# Altium PCB STM32_Smart.PcbDoc
Units mil, origin at the board's own origin, x right, y up, seen from the top; angles counter-clockwise.
Board outline 3440 x 2880 mil, 2 copper layers (Top Layer, Bottom Layer); 10 components, 49 nets, 149 pads, 0 vias.
Unrouted connection lines stored in the file: 91.
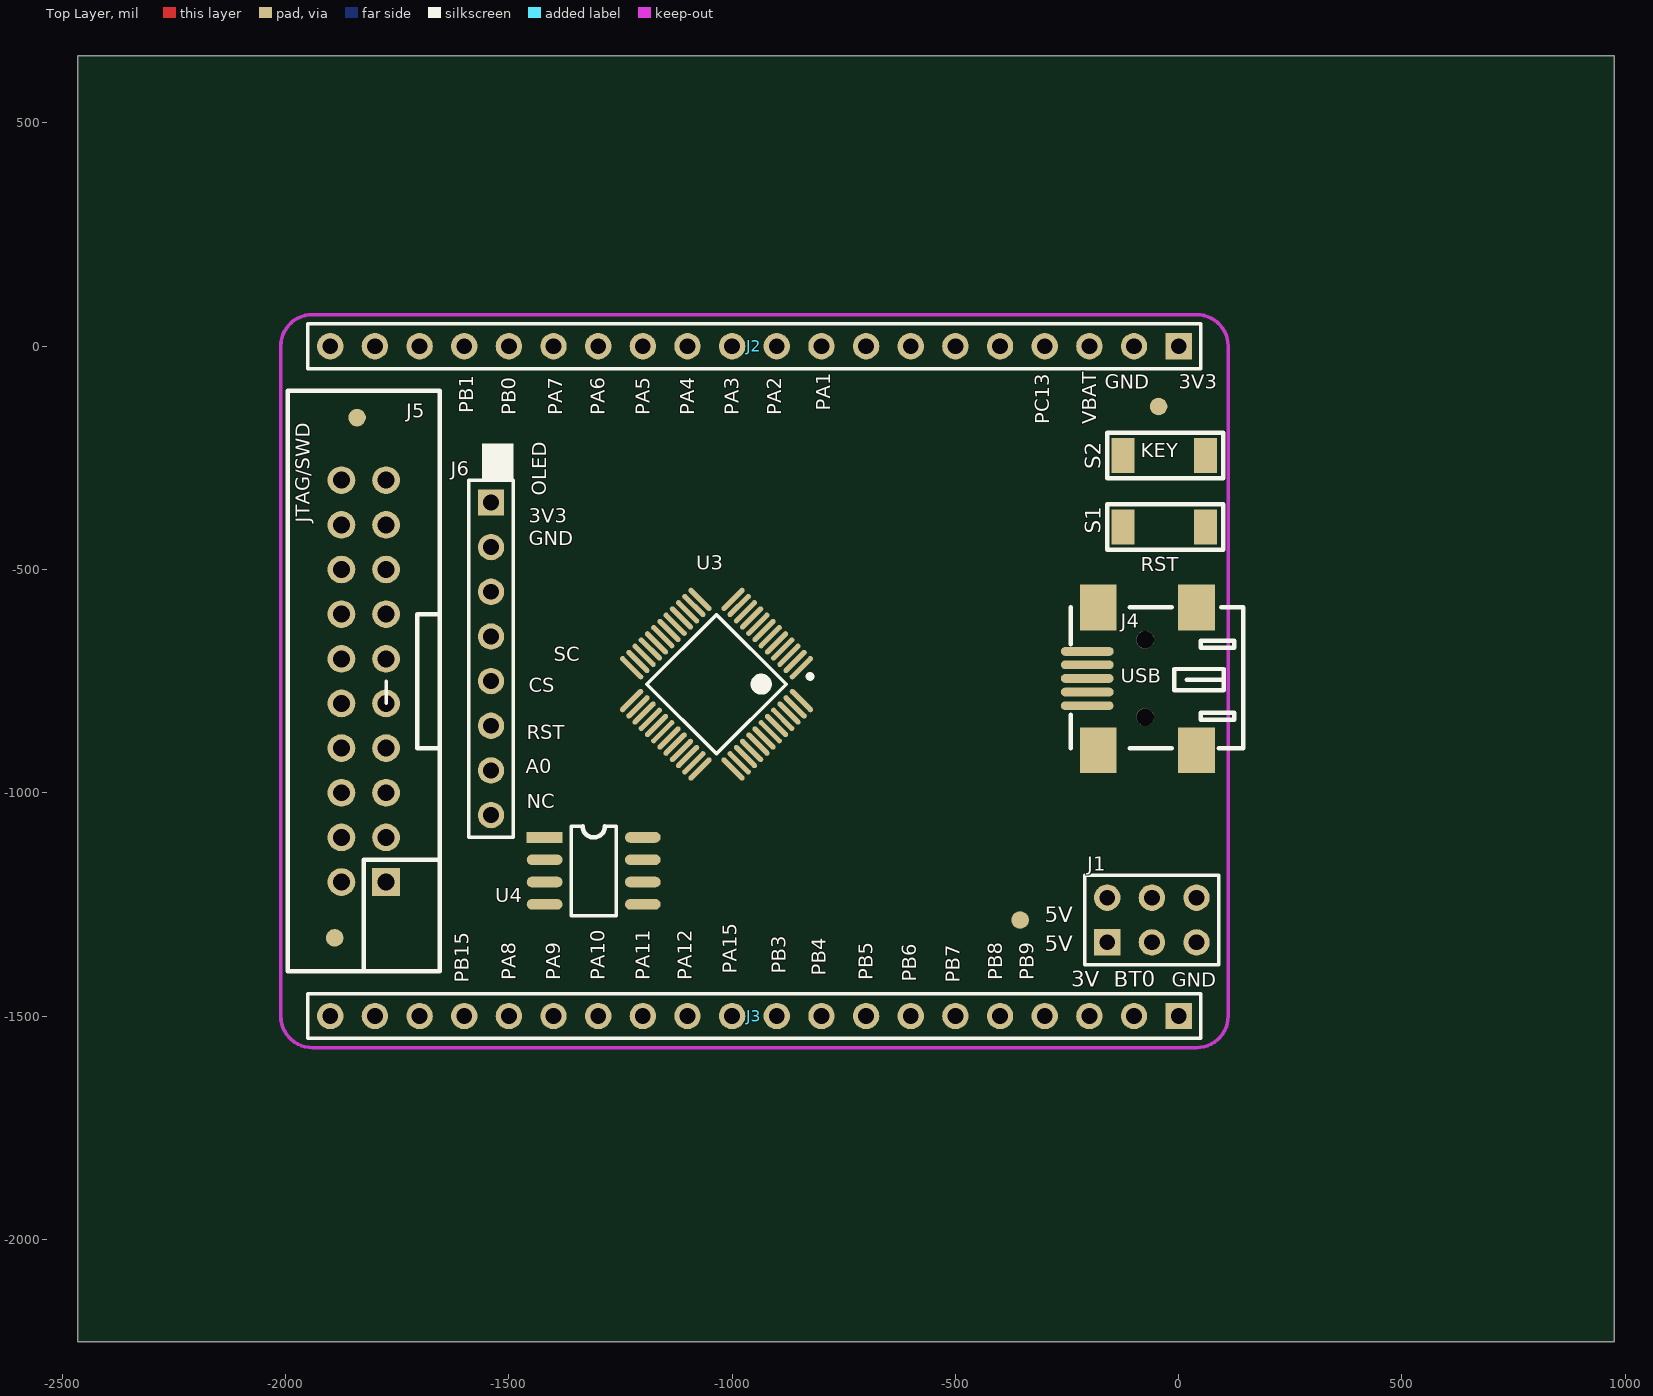
[diagram p0: Top Layer view]
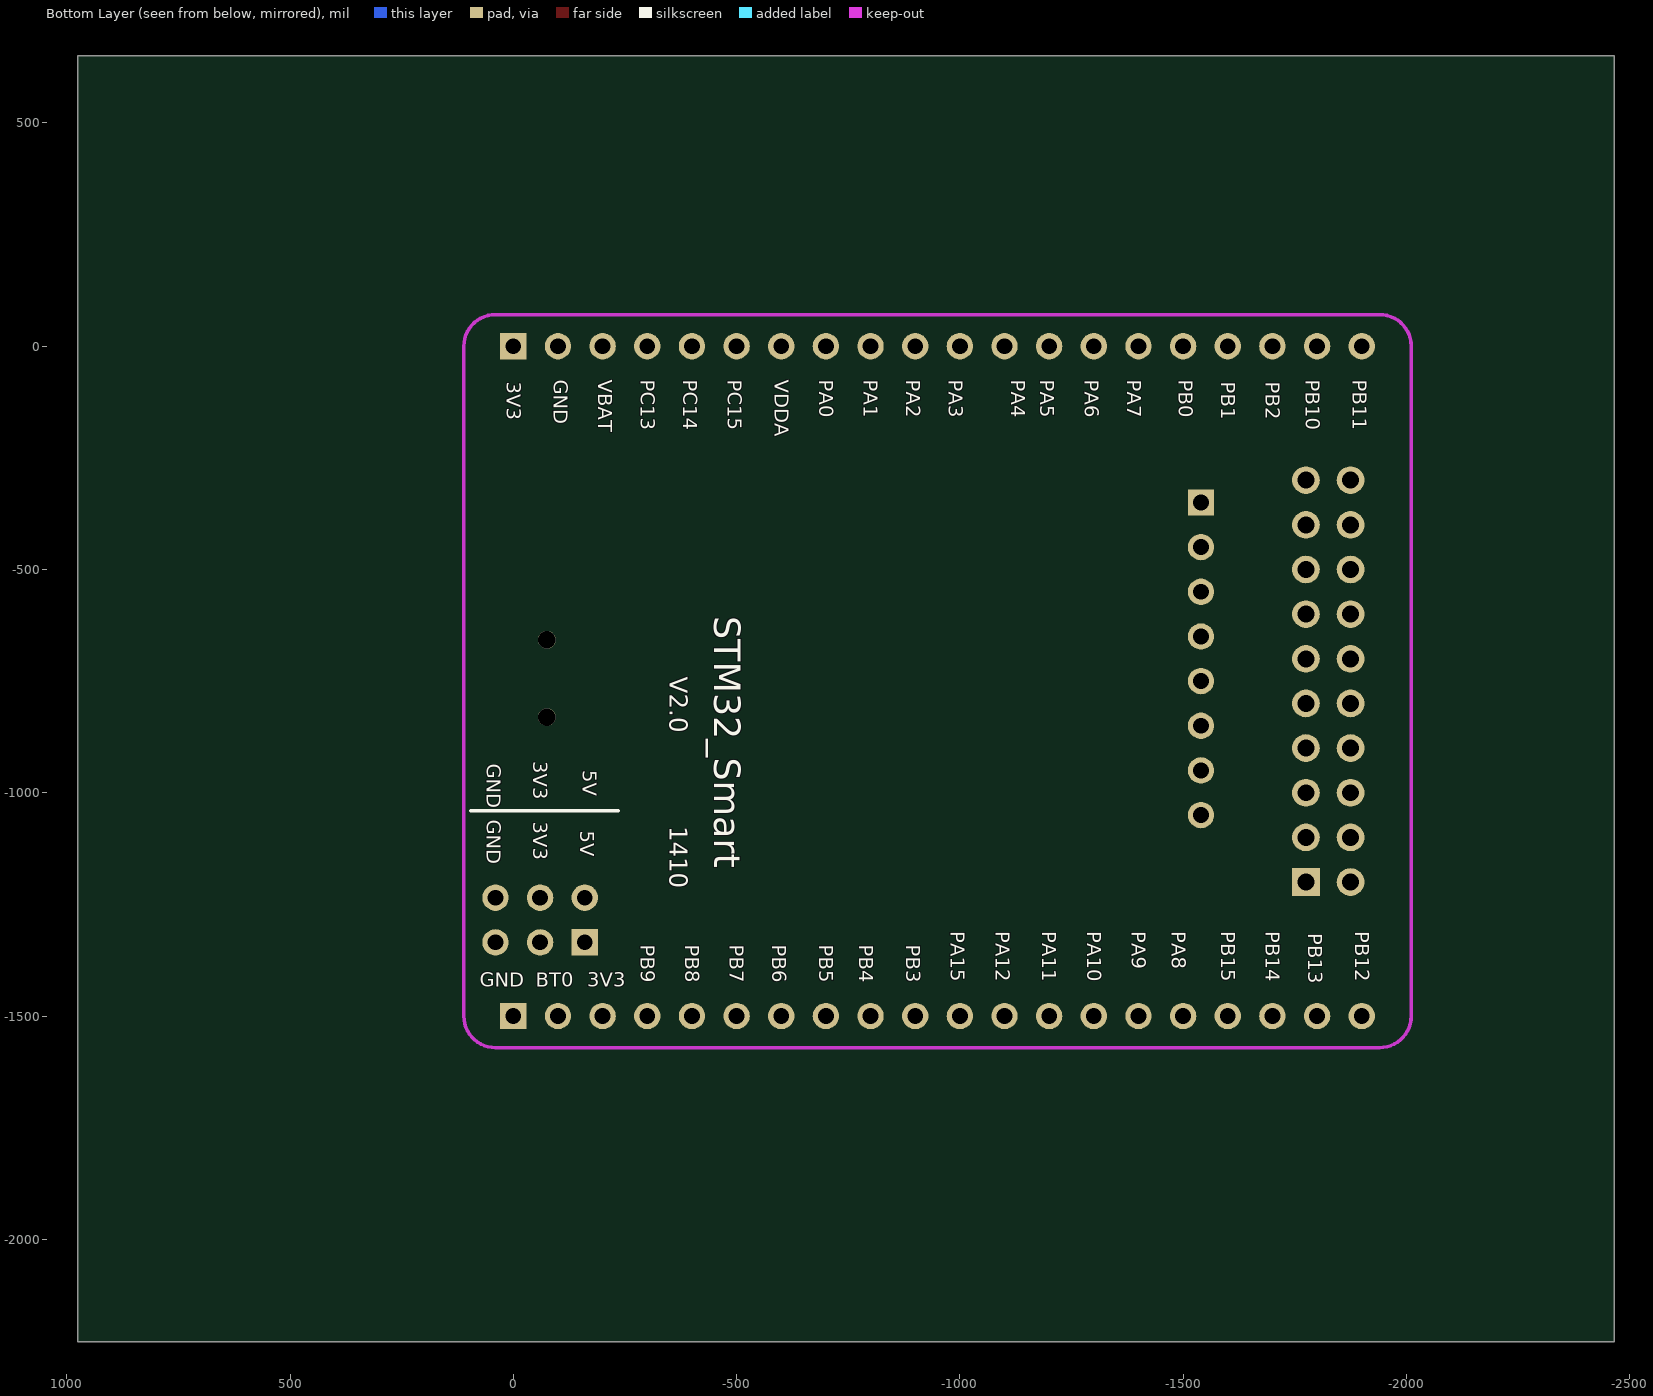
[diagram p1: Bottom Layer view, seen from below]

## Layer stack, top to bottom
Top Solder: solder mask 0.4, Solder Resist, Dk 3.5
Top Layer: signal copper 1.4
Dielectric1: dielectric 12.6, FR-4, Dk 4.8
Bottom Layer: signal copper 1.4
Bottom Solder: solder mask 0.4, Solder Resist, Dk 3.5

## Board outline
-2465,-2230 -2465,650 975,650 975,-2230

## Design rules (kind name [scope] priority, off if disabled: settings)
AssemblyTestPointUsage AssemblyTestPointUsage_1 [All] p2:
AssemblyTestpoint AssemblyTestpoint_1 [All] p2: testpointundercomponent=TRUE minsize=40 maxsize=100 preferedsize=60 minholesize=0 maxholesize=40 preferedholesize=32 testpointgrid=1 usegrid=TRUE gridtolerance=0.01 allowsidetop=TRUE allowsidebottom=TRUE
Clearance [All] p1: gap=16
ComponentClearance [All] p1: gap=1 collisioncheckmode=3 verticalgap=1 showdistances=FALSE
ComponentClearance ComponentClearance_1 [All] p2: gap=1 collisioncheckmode=3 verticalgap=1 showdistances=FALSE
DiffPairsRouting DiffPairsRouting_1 [All] p2: maxlimit=10 minlimit=10 mostfreqgap=10 toplayer_minwidth=15 toplayer_maxwidth=15 toplayer_prefwidth=15 bottomlayer_minwidth=15 bottomlayer_maxwidth=15 bottomlayer_prefwidth=15 maxuncoupledlength=500
FabricationTestPointUsage TestPointUsage [All] p2: valid=0 allowmultiple=FALSE
FabricationTestpoint Testpoint [All] p2: side=3 testpointundercomponent=TRUE minsize=40 maxsize=100 preferedsize=60 minholesize=0 maxholesize=40 preferedholesize=32 testpointgrid=1 allowsidetop=TRUE allowsidebottom=TRUE usegrid=TRUE gridtolerance=0.01
FanoutControl Fanout_LCC [IsLCC] p1: bgadir=Out bgaviamode=Centered fanoutstyle=Auto fanoutdirection=Alternating viagrid=1 // Fanout_LCC (Default Rule)
FanoutControl Fanout_BGA [IsBGA] p2: bgadir=Out bgaviamode=Centered fanoutstyle=Auto fanoutdirection=Alternating viagrid=1 // Fanout_BGA (Default Rule)
FanoutControl Fanout_Small [(CompPinCount < 5)] p3: bgadir=Out bgaviamode=Centered fanoutstyle=Auto fanoutdirection=OutThenIn viagrid=1 // Fanout_Small (Default Rule)
FanoutControl Fanout_SOIC [IsSOIC] p4: bgadir=Out bgaviamode=Centered fanoutstyle=Auto fanoutdirection=Alternating viagrid=1 // Fanout_SOIC (Default Rule)
FanoutControl Fanout_BGA_1 [IsBGA] p6: bgadir=Out bgaviamode=Centered fanoutstyle=Auto fanoutdirection=Alternating viagrid=1 // Fanout_BGA (Default Rule)
FanoutControl Fanout_LCC_1 [IsLCC] p7: bgadir=Out bgaviamode=Centered fanoutstyle=Auto fanoutdirection=Alternating viagrid=1 // Fanout_LCC (Default Rule)
FanoutControl Fanout_SOIC_1 [IsSOIC] p8: bgadir=Out bgaviamode=Centered fanoutstyle=Auto fanoutdirection=Alternating viagrid=1 // Fanout_SOIC (Default Rule)
FanoutControl Fanout_Small_1 [(CompPinCount < 5)] p9: bgadir=Out bgaviamode=Centered fanoutstyle=Auto fanoutdirection=OutThenIn viagrid=1 // Fanout_Small (Default Rule)
FanoutControl Fanout_Default_1 [All] p10: bgadir=Out bgaviamode=Centered fanoutstyle=Auto fanoutdirection=Alternating viagrid=1 // Fanout_Default (Default Rule)
Height Height_1 [All] p2: minheight=0 maxheight=1000 prefheight=500
HoleSize HoleSize_1 [All] p2: absolutevalues=TRUE maxlimit=100 minlimit=1 maxpercent=80.000 minpercent=20.000
HoleToHoleClearance HoleToHoleClearance_1 [All] p2: gap=10 allowstackedmicrovias=TRUE
LayerPairs LayerPairs_1 [All] p2: enforce=TRUE
MinimumSolderMaskSliver MinimumSolderMaskSliver_1 [All] p2: minsoldermaskwidth=10
NetAntennae NetAntennae_1 [All] p2: netantennaetolerance=0
PasteMaskExpansion PasteMaskExpansion_1 [All] p2: expansion=0
PolygonConnect PolygonConnect_1 [(InPadClass('All Pads'))] p1: connectstyle=Relief reliefconductorwidth=8 reliefentries=4 polygonreliefangle="90 Angle" airgapwidth=10
PolygonConnect [All] p2: connectstyle=Direct reliefconductorwidth=10 reliefentries=4 polygonreliefangle="90 Angle" airgapwidth=10
RoutingPriority RoutingPriority_1 [All] p2: routingpriority=0
RoutingTopology RoutingTopology_1 [All] p2: topology=Shortest
RoutingVias [All] p1: holewidth=12 width=20 viastyle="Through Hole" minholewidth=12 minwidth=20 maxholewidth=12 maxwidth=20
SilkToSilkClearance SilkToSilkClearance_1 [All] p2: silktosilkclearance=10
SilkToSolderMaskClearance SilkscreenOverComponentPads [IsPad] p1: minsilkscreentomaskgap=10 clearancetoexposedcopper=TRUE
SilkToSolderMaskClearance SilkscreenOverComponentPads_1 [IsPad] p2: minsilkscreentomaskgap=10 clearancetoexposedcopper=TRUE
SolderMaskExpansion [All] p1: expansion=4
SolderMaskExpansion SolderMaskExpansion_1 [All] p2: expansion=4
UnpouredPolygon [All] p1: allowunpoured=FALSE
Width [All] p1: maxlimit=40 minlimit=8 preferedwidth=8
23 further rules are at their usual default settings.

## Components (designator, comment, footprint, x,y, rotation, side; value= is the part's Value field where it differs from the comment)
J1 "Header 3X2" IDE3X2-2.54 -160,-1335 r0 top
J2 "Header 20" HDR1X20 0,0 r180 top
J3 "Header 20" HDR1X20 0,-1500 r180 top
J4 "Mini-USB" mini_USB -205,-805 r270 top
J5 "" JTAG20P -1775,-1200 r90 top
J6 "TFT" HDR1X8 -1540,-350 r270 top
S1 "SW-SPST" SMT-KEY -125,-405 r270 top
S2 "SW-SPST" SMT-KEY -125,-245 r270 top
U3 "STM32F103C8T6" LQFP48 -845,-720 r135 top
U4 "AT24C04" SOIC-8P -1420,-1100 r270 top

## Footprints (in the part's own frame and the unit in brackets; to place one, negate y for a bottom-side part, rotate by r counter-clockwise, add the part's x,y. Pads: shape width x height; smd on the part's side, far side on the other; paste and mask are expansions set on the pad)
HDR1X8 [mm] "Connector; Header; 8 Position"
  rect 1.5x1.5 hole 0.9: 1(0,0)
  round 1.5 hole 0.9: 2(2.54,0) 3(5.08,0) 4(7.62,0) 5(10.16,0) 6(12.7,0) 7(15.24,0) 8(17.78,0)
  silkscreen extent -1.27,-1.27 19.05,1.27
HDR1X20 [mm] "Connector; Header; 20 Position"
  rect 1.5x1.5 hole 0.9: 1(0,0)
  round 1.5 hole 0.9: 2(2.54,0) 3(5.08,0) 4(7.62,0) 5(10.16,0) 6(12.7,0) 7(15.24,0) 8(17.78,0) 9(20.32,0) 10(22.86,0) 11(25.4,0) 12(27.94,0) 13(30.48,0) 14(33.02,0) 15(35.56,0) 16(38.1,0) 17(40.64,0) 18(43.18,0) 19(45.72,0) 20(48.26,0)
  silkscreen extent -1.27,-1.27 49.53,1.27
IDE3X2-2.54 [mm]
  rect 1.5x1.5 hole 0.9: 1(0,0)
  round 1.5 hole 0.9: 2(0,2.54) 3(2.54,0) 4(2.54,2.54) 5(5.08,0) 6(5.08,2.54)
  silkscreen extent -1.27,-1.27 6.35,3.81
JTAG20P [mil]
  rect 62x62 hole 38: 1(0,0)
  round 62 hole 38: 2(0,100) 3(100,0) 4(100,100) 5(200,0) 6(200,100) 7(300,0) 8(300,100) 9(400,0) 10(400,100) 11(500,0) 12(500,100) 13(600,0) 14(600,100) 15(700,0) 16(700,100) 17(800,0) 18(800,100) 19(900,0) 20(900,100)
  silkscreen extent -200,-120 1100,220
LQFP48 [mm]
  oval 0.3x1.75 smd: 1(0,0) 2(0.5,0) 3(1,0) 4(1.5,0) 5(2,0) 6(2.5,0) 7(3,0) 8(3.5,0) 9(4,0) 10(4.5,0) 11(5,0) 12(5.5,0) 25(5.5,8.15) 26(5,8.15) 27(4.5,8.15) 28(4,8.15) 29(3.5,8.15) 30(3,8.15) 31(2.5,8.15) 32(2,8.15) 33(1.5,8.15) 34(1,8.15) 35(0.5,8.15) 36(0,8.15)
  oval 1.75x0.3 smd: 13(6.825,1.325) 14(6.825,1.825) 15(6.825,2.325) 16(6.825,2.825) 17(6.825,3.325) 18(6.825,3.825) 19(6.825,4.325) 20(6.825,4.825) 21(6.825,5.325) 22(6.825,5.825) 23(6.825,6.325) 24(6.825,6.825) 37(-1.325,6.825) 38(-1.325,6.325) 39(-1.325,5.825) 40(-1.325,5.325) 41(-1.325,4.825) 42(-1.325,4.325) 43(-1.325,3.825) 44(-1.325,3.325) 45(-1.325,2.825) 46(-1.325,2.325) 47(-1.325,1.825) 48(-1.325,1.325)
  silkscreen extent -0.82,-0.12 5.55,6.88
mini_USB [mm]
  oval 0.5x3 smd: 1(0,0) 2(-0.775,0.009) 3(-1.549,0) 4(-2.324,0.009) 5(-3.086,0.009)
  rect 2.6x2.1 smd: ""(-5.588,6.223) ""(-5.588,0.635) ""(2.54,6.223) ""(2.54,0.635)
  round 1 hole 1: ""(-3.749,3.299) ""(0.651,3.299)
  silkscreen extent -5.59,-0.94 2.41,8.89
SMT-KEY [mm]
  rect 2x1.3 smd paste+0 mask+0.2: 1(0,0) 2(0,4.7)
  silkscreen extent -1.3,-0.89 1.3,5.72
SOIC-8P [mil]
  rect 24x80 smd mask+3: 1(0,0)
  oval 24x80 smd mask+3: 2(50,0) 3(100,0) 4(150,0) 5(150,220) 6(100,220) 7(50,220) 8(0,220)
  silkscreen extent -25,60 175,160

## Part data
J1: "Header, 3-Pin, Dual row"
J2 J3: "Header, 20-Pin"
J4: library part "Header 5", "Header, 5-Pin"
J5: library part "Header 10X2H", "Header, 10-Pin, Dual row, Right Angle"
J6: library part "Header 8", "Header, 8-Pin"
S1 S2: "Single-Pole, Single-Throw Switch"
U4: library part EPROM

## Free pads (board coordinates)
  round 39.37 smd: 0(-1840,-160) ""(-1890,-1325) ""(-355,-1285) ""(-45,-135)

## Nets (pads, with @x,y where several pads share a name; then routed paths per layer and width w, separated by ;. In a path a pad name is that pad's centre, name@x,y a point inside that pad or via, vN(x,y) a via of type N, cw(c..) or ccw(c..) an arc to the next point about the centre after c; other vN are vias at no path point)
3V3: J1.3 J1.4 J2.1 J3.3 J5.1 J5.2 J6.1 U3.24 U3.36 U3.48 U4.8
5V: J1.1 J1.2
BOOT0: J3.2 U3.44
GND: J1.5 J1.6 J2.2 J3.1 J4.5 J4.@40,-585 J4.@40,-905 J4.@-180,-585 J4.@-180,-905 J5.4 J5.6 J5.8 J5.10 J5.12 J5.14 J5.16 J5.18 J5.20 J6.2 S1.2 S2.2 U3.8 U3.23 U3.35 U3.47 U4.1 U4.2 U4.3 U4.4 U4.7
NetC9_1: U3.5
NetC10_1: U3.6
NetD1_1: 
NetD2_2: 
NetJ4_1: J4.1
NetJ4_2: J4.2
NetJ4_3: J4.3
NRST: J5.15 J6.6 S1.1 U3.7
PA0: J2.8 S2.1 U3.10
PA1: J2.9 U3.11
PA2: J2.10 U3.12
PA3: J2.11 U3.13
PA4: J2.12 U3.14
PA5: J2.13 U3.15
PA6: J2.14 U3.16
PA7: J2.15 U3.17
PA8: J3.16 U3.29
PA9: J3.15 U3.30
PA10: J3.14 U3.31
PA11: J3.13 U3.32
PA12: J3.12 U3.33
PB0: J2.16 U3.18
PB1: J2.17 J6.7 U3.19
PB2: J2.18 U3.20
PB5: J3.8 U3.41
PB6: J3.7 U3.42 U4.6
PB7: J3.6 U3.43 U4.5
PB8: J3.5 U3.45
PB9: J3.4 U3.46
PB10: J2.19 U3.21
PB11: J2.20 U3.22
PB12: J3.20 J6.5 U3.25
PB13: J3.19 J6.4 U3.26
PB14: J3.18 U3.27
PB15: J3.17 J6.3 U3.28
PC13: J2.4 U3.2
PC14: J2.5 U3.3
PC15: J2.6 U3.4
TCLK: J5.9 U3.37
TDI/PA15: J3.11 J5.5 U3.38
TDO/PB3: J3.10 J5.13 U3.39
TMS: J5.7 U3.34
TRST/PB4: J3.9 J5.3 U3.40
VBAT: J2.3 U3.1
VDDA: J2.7 U3.9
pads on no net: J4.4 J4.@-75.13,-657.38 J4.@-75.13,-830.61 J5.11 J5.17 J5.19 J6.8

## Keep-outs
Keep-Out Layer:
  lines w8: -2010.87,-1500 ccw(c-1940,-1500) -1940,-1570.87 40,-1570.87 ccw(c40,-1500) 110.87,-1500 110.87,0 ccw(c40,0) 40,70.87 -1940,70.87 ccw(c-1940,0) -2010.87,0 -2010.87,-1500

## Silkscreen, mask and mechanical layers (free items; w line width, h text height)
Top Overlay:
  rectangle: -1560,-300 -1490,-218
  lines w8: -1775,-800 -1775,-750 ; -290,-1450 -270,-1450
  text "GND" at -165,-95 h32
  text "3V3" at 0,-95 h32
  text "PA1" at -780,-145 h32 r90
  text "PB1" at -1580,-150 h32 r90
  text "PB0" at -1485,-155 h32 r90
  text "PA7" at -1380,-155 h32 r90
  text "PA6" at -1285,-155 h32 r90
  text "PA5" at -1185,-155 h32 r90
  text "PA4" at -1085,-155 h32 r90
  text "PA3" at -985,-155 h32 r90
  text "PA2" at -890,-155 h32 r90
  text "PC13" at -290,-175 h32 r90
  text "VBAT" at -185,-175 h32 r90
  text "KEY" at -85,-260 h55
  text "OLED" at -1405,-335 h55 r90
  text "JTAG/SWD" at -1935,-395 h55 r90
  text "3V3" at -1455.39,-395.53 h32
  text "GND" at -1455.39,-446 h32
  text "RST" at -85,-515 h55
  text "SC" at -1400,-705 h32
  text "USB" at -130,-765 h55
  text "CS" at -1455,-775 h32
  text "RST" at -1460,-880 h32
  text "A0" at -1461.73,-956.73 h32
  text "NC" at -1460,-1035 h32
  text "5V" at -300,-1290 h35
  text "5V" at -300,-1355 h35
  text "PA15" at -990,-1405 h32 r90
  text "PB3" at -880,-1405 h32 r90
  text "PB4" at -790,-1410 h32 r90
  text "PA8" at -1485,-1420 h32 r90
  text "PA9" at -1385,-1420 h32 r90
  text "PA10" at -1285,-1420 h32 r90
  text "PA11" at -1185,-1420 h32 r90
  text "PA12" at -1090,-1420 h32 r90
  text "PB5" at -685,-1420 h32 r90
  text "PB8" at -395,-1420 h32 r90
  text "PB9" at -325,-1420 h32 r90
  text "PB6" at -587.13,-1422.87 h32 r90
  text "PB15" at -1590,-1425 h32 r90
  text "PB7" at -490,-1425 h32 r90
  text "3V" at -240,-1435 h35
  text "BT0" at -145,-1435 h35
  text "GND" at -15,-1435 h32
Bottom Overlay:
  lines w8: -235,-1040 95,-1040
  text "PB11" at -1880,-75 h32 r90
  text "PB10" at -1775,-75 h32 r90
  text "PB0" at -1490,-75 h32 r90
  text "PA7" at -1375,-75 h32 r90
  text "PA6" at -1280,-75 h32 r90
  text "PA5" at -1180,-75 h32 r90
  text "PA4" at -1115,-75 h32 r90
  text "PA3" at -975,-75 h32 r90
  text "PA2" at -880,-75 h32 r90
  text "PA1" at -785,-75 h32 r90
  text "PA0" at -685,-75 h32 r90
  text "VDDA" at -585,-75 h32 r90
  text "PC15" at -480,-75 h32 r90
  text "PC14" at -380,-75 h32 r90
  text "PC13" at -285,-75 h32 r90
  text "VBAT" at -190,-75 h32 r90
  text "GND" at -90,-75 h32 r90
  text "PB2" at -1685,-80 h32 r90
  text "PB1" at -1585,-80 h32 r90
  text "3V3" at 15,-80 h32 r90
  text "STM32_Smart" at -450,-605 h60 r90
  text "V2.0" at -350,-740 h40 r90
  text "3V3" at -45,-930 h32 r90
  text "GND" at 60,-935 h32 r90
  text "5V" at -155,-950 h32 r90
  text "GND" at 60,-1060 h32 r90
  text "3V3" at -45,-1065 h32 r90
  text "1410" at -350,-1075 h40 r90
  text "5V" at -150,-1085 h32 r90
  text "PB12" at -1885,-1310 h32 r90
  text "PB14" at -1685,-1310 h32 r90
  text "PB15" at -1585,-1310 h32 r90
  text "PA8" at -1475,-1310 h32 r90
  text "PA9" at -1385,-1310 h32 r90
  text "PA10" at -1285,-1310 h32 r90
  text "PA11" at -1184,-1310 h32 r90
  text "PA12" at -1080,-1310 h32 r90
  text "PA15" at -980,-1310 h32 r90
  text "PB13" at -1780,-1315 h32 r90
  text "PB3" at -880,-1340 h32 r90
  text "PB4" at -775,-1340 h32 r90
  text "PB5" at -685,-1340 h32 r90
  text "PB6" at -580,-1340 h32 r90
  text "PB7" at -485,-1340 h32 r90
  text "PB8" at -385,-1340 h32 r90
  text "PB9" at -285,-1340 h32 r90
  text "3V3" at -165.87,-1434.13 h32
  text "BT0" at -50,-1435 h32
  text "GND" at 75,-1435 h32